# EAGLE board timetracker-1-4 (EAGLE 7.5.0)
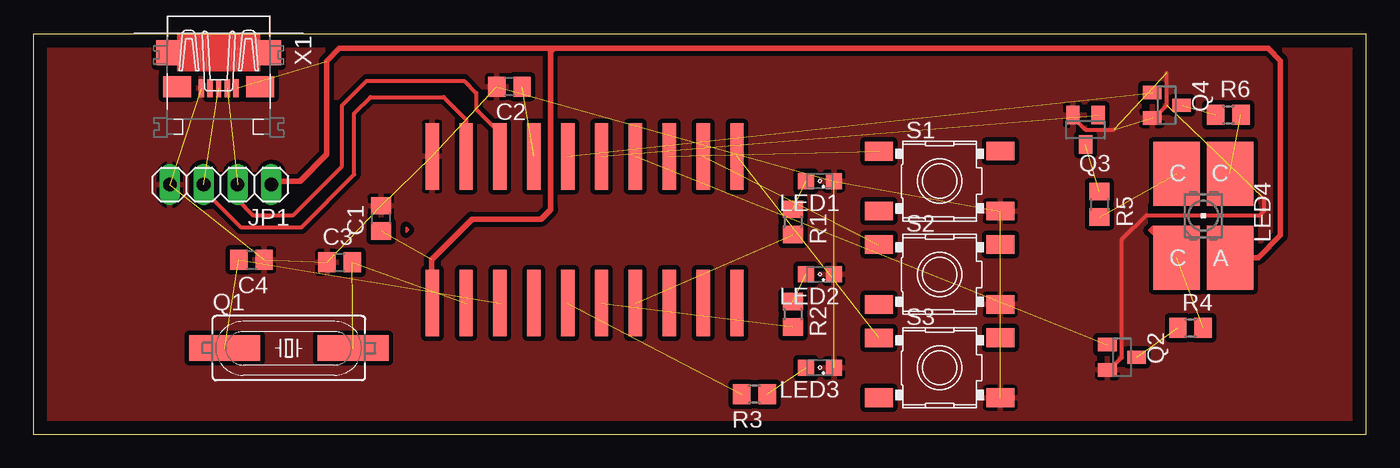
[diagram p0: board, top side]

Size 100 x 30 mm. Coordinates in mm from the lower left corner, seen from the top.
Outline: 0,0 100,0 100,30 0,30 0,0
Copper layers (1*16): Top 0.035mm / dielectric 1.5mm / Bottom 0.035mm
Design rules "default": minimum track width 10mil, minimum drill 24mil, track to track 8mil, track to pad 8mil, pad to pad 8mil, via to via 8mil, smd to smd 8mil, copper to edge 40mil, drill to drill 8mil, minimum pad ring 10mil, minimum via ring 8mil, stop-mask expansion 4mil, vias tented up to drill 0mil, thermal gap 10mil

## Footprints (pad centres in the part's own frame; a part is rotated, then mirrored left to right if it is on the bottom)
C0805 = smd 1.3 x 1.5: 1 -0.95,0; 2 0.95,0
1X04 = drill 1.016 long: 1 -3.81,0; 2 -1.27,0; 3 1.27,0; 4 3.81,0
SML0805 = smd 1.2 x 1.2: A 1.05,0; C -1.05,0
P-LCC-4 = smd 3.5 x 4.8: A -2,3.15; C@1 2,3.15; C@3 -2,-3.15; C@4 2,-3.15
HC49UP = smd 5.334 x 1.93: 1 -4.826,0; 2 4.826,0
SOT23 = smd 1 x 1.4: 1 -0.95,-1.1; 2 0.95,-1.1; 3 0,1.1
R0805 = smd 1.3 x 1.5: 1 -0.95,0; 2 0.95,0
TACTSW-6X6 = smd 2.1 x 1.4: 1 -4.55,2.24; 2 4.55,2.25; 3 -4.55,-2.25; 4 4.55,-2.25
DIL20-SMD = smd 1 x 5: 1 -11.43,-5.5; 2 -8.89,-5.5; 3 -6.35,-5.5; 4 -3.81,-5.5; 5 -1.27,-5.5; 6 1.27,-5.5; 7 3.81,-5.5; 8 6.35,-5.5; 9 8.89,-5.5; 10 11.43,-5.5; 11 11.43,5.5; 12 8.89,5.5; 13 6.35,5.5; 14 3.81,5.5; 15 1.27,5.5; 16 -1.27,5.5; 17 -3.81,5.5; 18 -6.35,5.5; 19 -8.89,5.5; 20 -11.43,5.5
MICRO-B-PAC = smd 1.35 x 0.4: 1 2.675,1.3; 2 2.675,0.65; 3 2.675,0; 4 2.675,-0.65; 5 2.675,-1.3 | smd 1.9 x 1.8: M1 0,-3.8; M2 0,3.8 | smd 1.6 x 2.1: M3 2.55,3.1; M4 2.55,-3.1

## Placement (x,y rotation side)
C1  1 uF  [C0805]  26.09,16.2 90 top
C2  470 n  [C0805]  35.72,26.09 180 top
C3  18 pF  [C0805]  22.98,12.91 0 top
C4  18 pF  [C0805]  16.37,13.09 180 top
JP1  [1X04]  14.05,18.74 180 top
LED1  [SML0805]  59,19 180 top
LED2  [SML0805]  59,12 180 top
LED3  [SML0805]  59,5 180 top
LED4  [P-LCC-4]  87.78,16.41 180 top
Q1  [HC49UP]  19.17,6.48 0 top
Q2  BSS123  [SOT23]  81.69,5.79 270 top
Q3  BSS123  [SOT23]  78.94,22.86 180 top
Q4  BSS123  [SOT23]  85.04,24.69 270 top
R1  [R0805]  56.99,15.94 270 top
R2  [R0805]  56.99,9.02 270 top
R3  [R0805]  54.1,3.01 180 top
R4  [R0805]  86.82,7.99 0 top
R5  [R0805]  79.99,17.26 270 top
R6  [R0805]  89.66,23.99 0 top
S1  TACTSW-6X6  [TACTSW-6X6]  68,19 0 top
S2  TACTSW-6X6  [TACTSW-6X6]  68,12 0 top
S3  TACTSW-6X6  [TACTSW-6X6]  68,5 0 top
U$1  PIC18F14K50SMD  [DIL20-SMD]  41.36,15.35 0 top
X1  MICRO-USB-B  [MICRO-B-PAC]  13.9,28.64 270 top

## Library data of the parts
C1-C4 R1-R6 = rcl
JP1 = pinhead
LED1-LED3 = led
LED4 S1-S3 X1 = g-e2e-training
Q1 = crystal; OC_FARNELL: unknown; OC_NEWARK: unknown
Q2-Q4 = transistor-small-signal
U$1 = timetracker

## Nets
+5V: C1.1 JP1.1 LED4.A U$1.1 X1.1
GND: C1.2 C2.2 C3.1 C4.1 JP1.4 LED1.C LED2.C LED3.C Q2.2 Q3.2 Q4.2 S1.4 S2.4 S3.4 U$1.20 X1.5
N$1: C2.1 U$1.17
N$2: C3.2 Q1.2 U$1.2
N$3: C4.2 Q1.1 U$1.3
N$4: JP1.3 U$1.19 X1.3
N$5: JP1.2 U$1.18 X1.2
N$8: LED1.A R1.1
N$9: R1.2 U$1.7
N$10: R2.2 U$1.6
N$11: LED2.A R2.1
N$12: R3.2 U$1.5
N$13: LED3.A R3.1
N$14: Q2.3 R4.1
N$15: LED4.C@1 R4.2
N$16: Q2.1 U$1.14
N$17: Q3.1 U$1.15
N$18: Q4.1 U$1.16
N$19: LED4.C@4 R5.2
N$20: LED4.C@3 R6.2
N$21: Q3.3 R5.1
N$22: Q4.3 R6.1
N$23: S1.1 U$1.13
N$24: S2.1 U$1.12
N$25: S3.1 U$1.11

## Tracks (layer width: path | path; a pad name or v marks a point on that pad's centre or on a via)
+5V  (2 unrouted)
  Top 0.406: JP1.1 18.12,19 20,19 22,21 22,28 22.96,28.96 39.01,28.96 | 39.01,28.96 92.66,28.96 93.57,28.04 93.57,14.94 91.9,13.26 LED4.A | U$1.1 29.87,9.91 29.87,13.11 32.92,16.15 38.1,16.15 38.81,16.87 38.81,28.75 39.01,28.96
GND  (15 unrouted)
  Top 0.305: Q3.2 77.99,23.81 78.94,22.86 81.08,22.86 | Q4.2 83.86,23.74 83.82,23.77 84.12,23.77 85.04,24.69 85.04,27.13 | Q2.2 80.74,4.84 81.69,5.79 81.69,14.63 83.52,16.46 92.05,16.46 92.35,16.76 92.35,17.68
  pour Top (isolate 0.356): 0,30 0,0 100,0 100,30
N$1  (1 unrouted)
N$2  (2 unrouted)
N$3  (2 unrouted)
N$4  (1 unrouted)
  Top 0.305: JP1.3 12.78,18.31 15.54,15.54 20.12,15.54 24.08,19.51 24.08,24.08 25.3,25.3 30.79,25.3 32.47,23.61 U$1.19
N$5  (1 unrouted)
  Top 0.305: JP1.2 15.32,17.6 16.46,16.46 19.51,16.46 23.16,20.12 23.16,24.69 24.99,26.52 32.31,26.52 33.22,25.6 33.22,24.38 35.01,22.6 U$1.18
N$8  (1 unrouted)
N$9  (1 unrouted)
N$10  (1 unrouted)
N$11  (1 unrouted)
N$12  (1 unrouted)
N$13  (1 unrouted)
N$14  (1 unrouted)
N$15  (1 unrouted)
N$16  (1 unrouted)
N$17  (1 unrouted)
N$18  (1 unrouted)
N$19  (1 unrouted)
N$20  (1 unrouted)
N$21  (1 unrouted)
N$22  (1 unrouted)
N$23  (1 unrouted)
N$24  (1 unrouted)
N$25  (1 unrouted)